# Altium PCB PLACAInterconexion.PcbDoc
Units mm, origin at the board's own origin, x right, y up, seen from the top; angles counter-clockwise.
Board outline 60 x 45 mm, 2 copper layers (Top Layer, Bottom Layer); 10 components, 24 nets, 52 pads, 0 vias.
Unrouted connection lines stored in the file: 1.
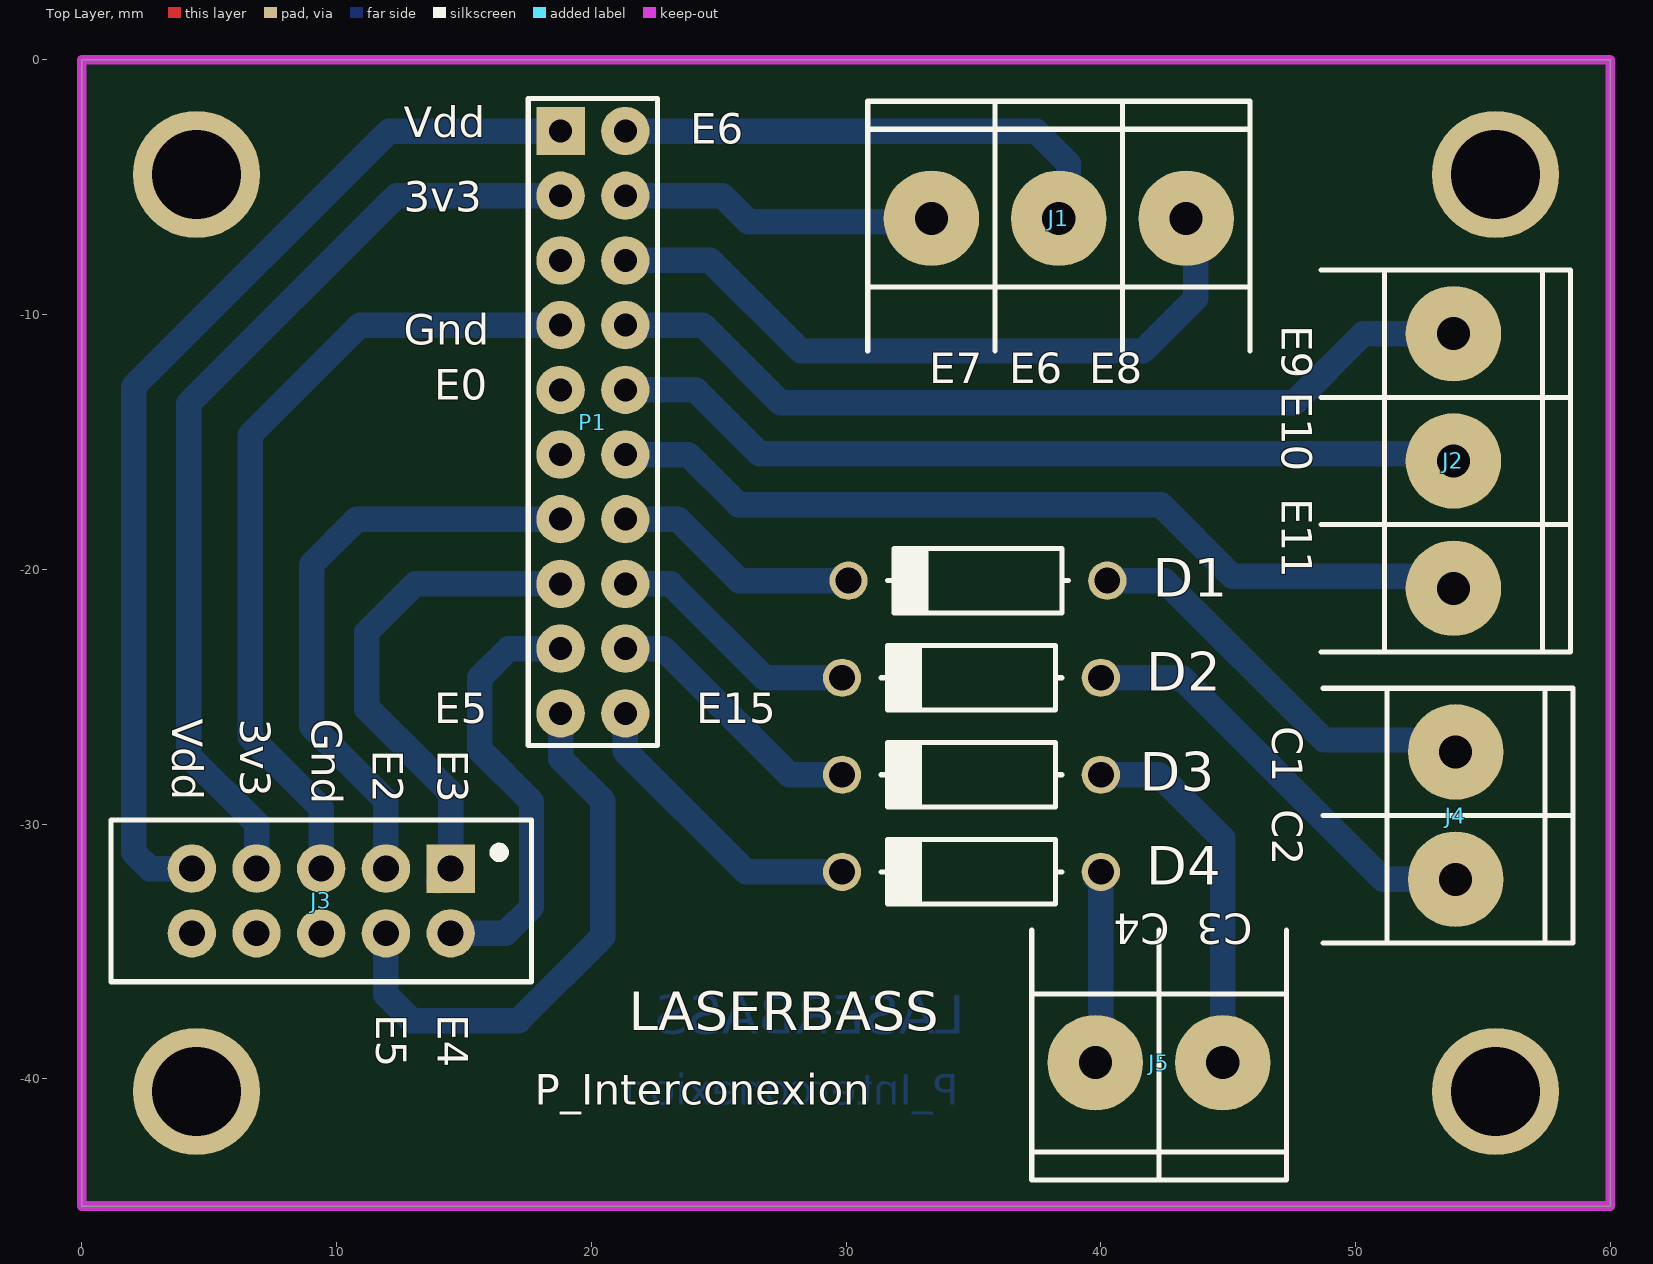
[diagram p0: Top Layer view]
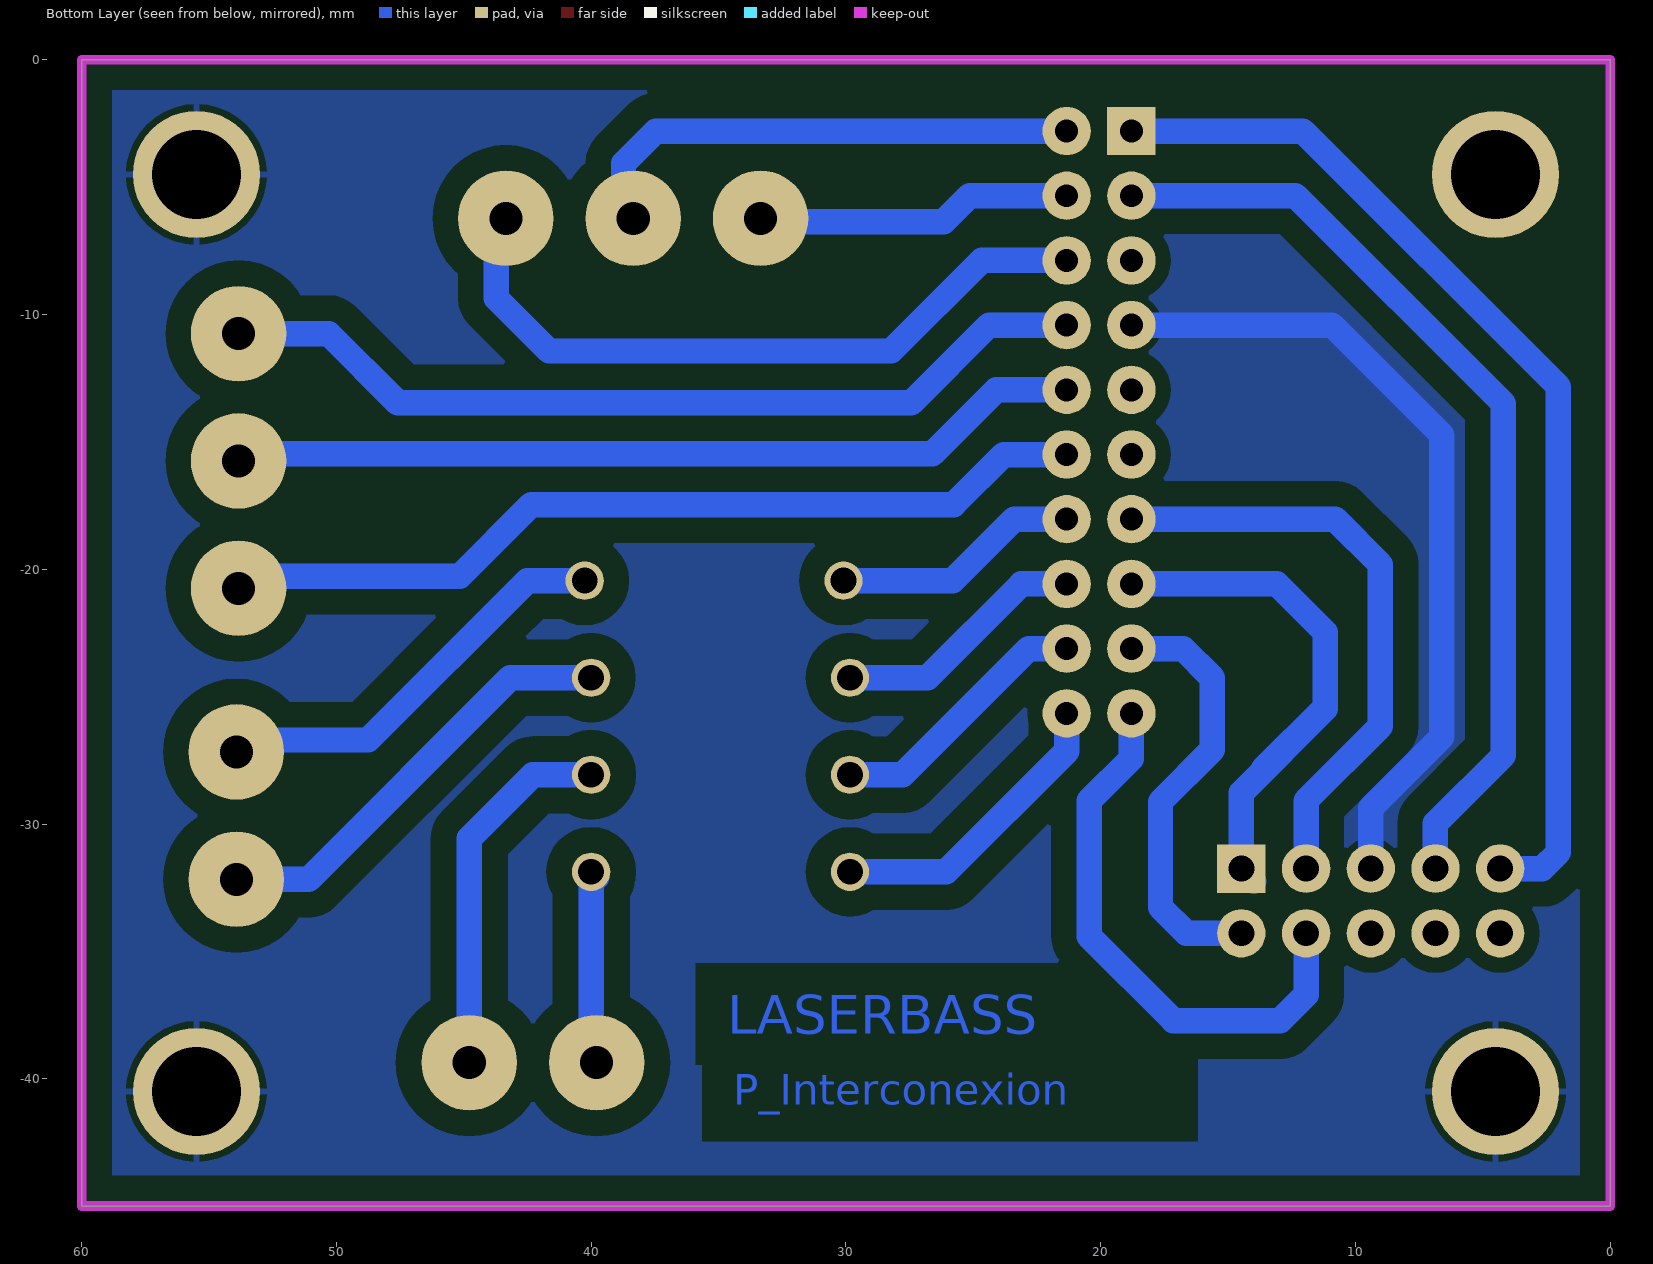
[diagram p1: Bottom Layer view, seen from below]

## Layer stack, top to bottom
Top Solder: solder mask 0.0102, Solder Resist, Dk 3.5
Top Layer: signal copper 0.0356
Dielectric 1: dielectric 0.32, FR-4, Dk 4.8
Bottom Layer: signal copper 0.0356
Bottom Solder: solder mask 0.0102, Solder Resist, Dk 3.5

## Board outline
0,-45 0,0 60,0 60,-45

## Design rules (kind name [scope] priority, off if disabled: settings)
Clearance Clearance_1 [All vs (InComponent('P1') OR InComponent('J3'))] p1: gap=0.6
Clearance [All] p2: gap=1
PolygonConnect [All] p1: connectstyle=Relief reliefconductorwidth=0.254 reliefentries=4 polygonreliefangle="90 Angle" airgapwidth=0.254
RoutingLayers [All] p1: top layer_v5=FALSE bottom layer_v5=TRUE
RoutingVias [All] p1: holewidth=0.711 width=1.27 viastyle="Through Hole" minholewidth=0.711 minwidth=1.27 maxholewidth=0.711 maxwidth=1.27
SolderMaskExpansion [All] p1: expansion=0.102
Width [All] p1: maxlimit=1.1 minlimit=1 preferedwidth=1
29 further rules are at their usual default settings.

## Components (designator, comment, footprint, x,y, rotation, side; value= is the part's Value field where it differs from the comment)
D1 "1N4148" DO41 35.179,-20.447 r180 top
D2 "1N4148" DO41 34.925,-24.257 r180 top
D3 "1N4148" DO41 34.925,-28.067 r180 top
D4 "1N4148" DO41 34.925,-31.877 r180 top
J1 "BORNERA 3" BORNERA3 38.354,-6.223 r270 top
J2 "BORNERA 3" BORNERA3 53.848,-15.748 r180 top
J3 "CON5*2" SIP5*2 14.478,-34.29 r180 top
J4 "BORNERA 2" BORNERA2 53.935,-29.672 r180 top
J5 "BORNERA 2" BORNERA2 42.291,-39.37 r90 top
P1 "Header 10X2A" HDR2X10_CEN 18.796,-2.794 r270 top

## Footprints (in the part's own frame and the unit in brackets; to place one, negate y for a bottom-side part, rotate by r counter-clockwise, add the part's x,y. Pads: shape width x height; smd on the part's side, far side on the other; paste and mask are expansions set on the pad)
BORNERA2 [mm] "Bornera con Tornillos 5mm separación"
  round 3.75 hole 1.3: 1(0,2.5) 2(0,-2.5)
  silkscreen extent -4.6,-5 5.2,5, body extent -3.76,-4.89 3.94,5.61, height 10
BORNERA3 [mm] "Bornera con Tornillos 5mm separación"
  round 3.75 hole 1.3: 1(0,5) 2(0,0) 3(0,-5)
  silkscreen extent -4.6,-7.5 5.2,7.5, body extent -3.76,-7.39 3.94,8.11, height 10.05
DO41 [mm]
  round 1.5 hole 1.016: 1(-5.08,0) 2(5.08,0)
  silkscreen extent -3.56,-1.27 3.56,1.27, body extent -5.46,-1.19 5.46,1.37, height 2.03
HDR2X10_CEN [mm] "Connector; Header; 10x2 Position"
  rect 1.9x1.9 hole 0.9: 1(0,0)
  round 1.9 hole 0.9: 2(2.54,0) 3(5.08,0) 4(7.62,0) 5(10.16,0) 6(12.7,0) 7(15.24,0) 8(17.78,0) 9(20.32,0) 10(22.86,0) 11(0,2.54) 12(2.54,2.54) 13(5.08,2.54) 14(7.62,2.54) 15(10.16,2.54) 16(12.7,2.54) 17(15.24,2.54) 18(17.78,2.54) 19(20.32,2.54) 20(22.86,2.54)
  silkscreen extent -1.27,-1.27 24.13,3.81
SIP5*2 [mm] "Bornera con Tornillos 5mm separación"
  rect 1.9x1.9 hole 1.016: 1(0,-2.54)
  round 1.9 hole 1.016: 2(0,0) 3(2.54,-2.54) 4(2.54,0) 5(5.08,-2.54) 6(5.08,0) 7(7.62,-2.54) 8(7.62,0) 9(10.16,-2.54) 10(10.16,0)
  silkscreen extent -3.18,-4.45 13.33,1.91, body extent -1.26,-3.84 11.44,1.24, height 10.1

## Part data
D1 D2 D3 D4: library part DIODO
P1: "Header, 10-Pin, Dual row"

## Free pads (board coordinates)
  round 5 hole 3.5: 0(4.5,-40.5) 0(4.5,-4.5) 0(55.5,-40.5) 0(55.5,-4.5)

## Nets (pads, with @x,y where several pads share a name; then routed paths per layer and width w, separated by ;. In a path a pad name is that pad's centre, name@x,y a point inside that pad or via, vN(x,y) a via of type N, cw(c..) or ccw(c..) an arc to the next point about the centre after c; other vN are vias at no path point)
3V3: J3.7 P1.2 | length 37.3
  Bottom Layer w1: J3.7 6.858,-29.972 4.191,-27.305 4.191,-13.496 12.353,-5.334 P1.2
CUERDA1: D1.1 J4.2 | length 16.7
  Bottom Layer w1: D1.1 42.511,-20.447 48.766,-26.702 52.988,-26.702 52.988,-27.172 J4.2
CUERDA2: D2.1 J4.1 | length 17.2
  Bottom Layer w1: D2.1 43.18,-24.257 51.095,-32.172 J4.1
CUERDA3: D3.1 J5.2 | length 14.5
  Bottom Layer w1: D3.1 42.291,-28.067 44.791,-30.567 J5.2@44.791,-39.243
CUERDA4: D4.1 J5.1 | length 7.7
  Bottom Layer w1: D4.1@39.791,-32.091 D4.1 40.005,-39.076 J5.1@40.172,-39.243
EXP0: P1.5
EXP1: P1.6
EXP2: J3.3 P1.7 | length 23.7
  Bottom Layer w1: J3.3 11.938,-29.083 9.017,-26.162 9.017,-19.812 10.795,-18.034 P1.7
EXP3: J3.1 P1.8 | length 23.1
  Bottom Layer w1: 11.176,-25.469 14.478,-28.771 J3.1 J3.1@13.988,-32.24 ; 13.621,-27.845 11.176,-25.4 11.176,-22.479 13.081,-20.574 P1.8
EXP4: J3.2 P1.9 | length 17.1
  Bottom Layer w1: J3.2 16.637,-34.29 17.653,-33.274 17.653,-29.117 15.621,-27.085 15.621,-24.257 16.764,-23.114 P1.9
EXP5: J3.4 P1.10 | length 22.2
  Bottom Layer w1: J3.4 11.938,-36.703 12.954,-37.719 17.145,-37.719 20.447,-34.417 20.447,-29.083 18.796,-27.432 P1.10
EXP6: J1.2 P1.11 | length 20
  Bottom Layer w1: P1.11 37.465,-2.794 38.735,-4.064 J1.2@38.735,-6.096
EXP7: J1.3 P1.12 | length 12.9
  Bottom Layer w1: P1.12 25.146,-5.334 26.162,-6.35 J1.3@33.608,-6.35 ; J1.3@33.608,-6.223 J1.3@33.735,-6.096
EXP8: J1.1 P1.13 | length 28
  Bottom Layer w1: P1.13 24.672,-7.874 28.228,-11.43 41.656,-11.43 43.735,-9.351 J1.1@43.735,-6.096
EXP9: J2.3 P1.14 | length 34.9
  Bottom Layer w1: P1.14 24.384,-10.414 27.432,-13.462 47.598,-13.462 50.312,-10.748 J2.3
EXP10: J2.2 P1.15 | length 33.9
  Bottom Layer w1: P1.15 24.096,-12.954 26.604,-15.462 52.887,-15.462 J2.2@53.848,-16.423
EXP11: J2.1 P1.16 | length 34.2
  Bottom Layer w1: P1.16 23.807,-15.494 25.775,-17.462 42.354,-17.462 45.172,-20.28 J2.1@53.594,-20.28
EXP12: D1.2 P1.17 | length 9.8
  Bottom Layer w1: P1.17 23.402,-18.034 25.815,-20.447 D1.2
EXP13: D2.2 P1.18 | length 10
  Bottom Layer w1: P1.18 23.114,-20.574 26.797,-24.257 D2.2
EXP14: D3.2 P1.19 | length 10.6
  Bottom Layer w1: P1.19 22.826,-23.114 27.779,-28.067 D3.2
EXP15: D4.2 P1.20 | length 12
  Bottom Layer w1: P1.20 21.336,-27.144 26.069,-31.877 D4.2
GND: J3.5 P1.4 pad.0@4.5,-40.5 pad.0@55.5,-4.5 pad.0@55.5,-40.5 | length 32.2
  Bottom Layer w1: J3.5 9.398,-29.371 6.604,-26.577 6.604,-14.732 10.922,-10.414 P1.4
VCC: P1.3
VDD: J3.9 P1.1 | length 41.8
  Bottom Layer w1: J3.9 2.667,-31.75 2.032,-31.115 2.032,-12.827 12.065,-2.794 P1.1
pads on no net: J3.6 J3.8 J3.10

## Polygon pours and split planes (outlines as drawn)
GND on Bottom Layer "TOP Layer-No Net" (solid, remove dead copper, pour order 3): 0,0 0.381,-0.381 60.071,-0.381 60.071,-44.929 60,-45 59.704,-44.704 0.254,-44.704 0.254,-0.254 0,0

## Keep-outs
Keep-Out Layer:
  the board outline again, w0.381

## Other copper
Bottom Layer:
  text "LASERBASS" at 34.671,-38.227 h1.52
  text "P_Interconexion" at 34.417,-41.021 h1.2

## Silkscreen, mask and mechanical layers (free items; w line width, h text height)
Top Overlay:
  text "Vdd" at 12.643,-3.048 h1.2
  text "E6" at 23.876,-3.302 h1.2
  text "3v3" at 12.643,-5.969 h1.2
  text "E9 E10  E11" at 47.117,-10.414 h1.2 r270
  text "Gnd" at 12.643,-11.176 h1.2
  text "E7  E6  E8" at 33.274,-12.7 h1.2
  text "E0" at 13.843,-13.335 h1.2
  text "Vdd" at 3.556,-25.876 h1.2 r270
  text "3v3" at 6.223,-25.876 h1.2 r270
  text "Gnd" at 9.017,-25.876 h1.2 r270
  text "E5" at 13.843,-26.035 h1.2
  text "E15" at 24.13,-26.035 h1.2
  text "C1  C2" at 46.736,-26.162 h1.2 r270
  text "E2" at 11.43,-27.076 h1.2 r270
  text "E3" at 13.97,-27.076 h1.2 r270
  text "C3  C4" at 45.974,-33.528 h1.2 r180
  text "E5" at 11.557,-37.465 h1.2 r270
  text "E4" at 13.97,-37.465 h1.2 r270
  text "LASERBASS" at 21.463,-38.1 h1.52
  text "P_Interconexion" at 17.78,-41.021 h1.2